# Altium PCB LED.PcbDoc (part 1 of 2)
Units mil, origin at the board's own origin, x right, y up, seen from the top; angles counter-clockwise.
Board outline 7000 x 7000 mil, 2 copper layers (Top Layer, Bottom Layer); 226 components, 111 nets, 676 pads, 222 vias.
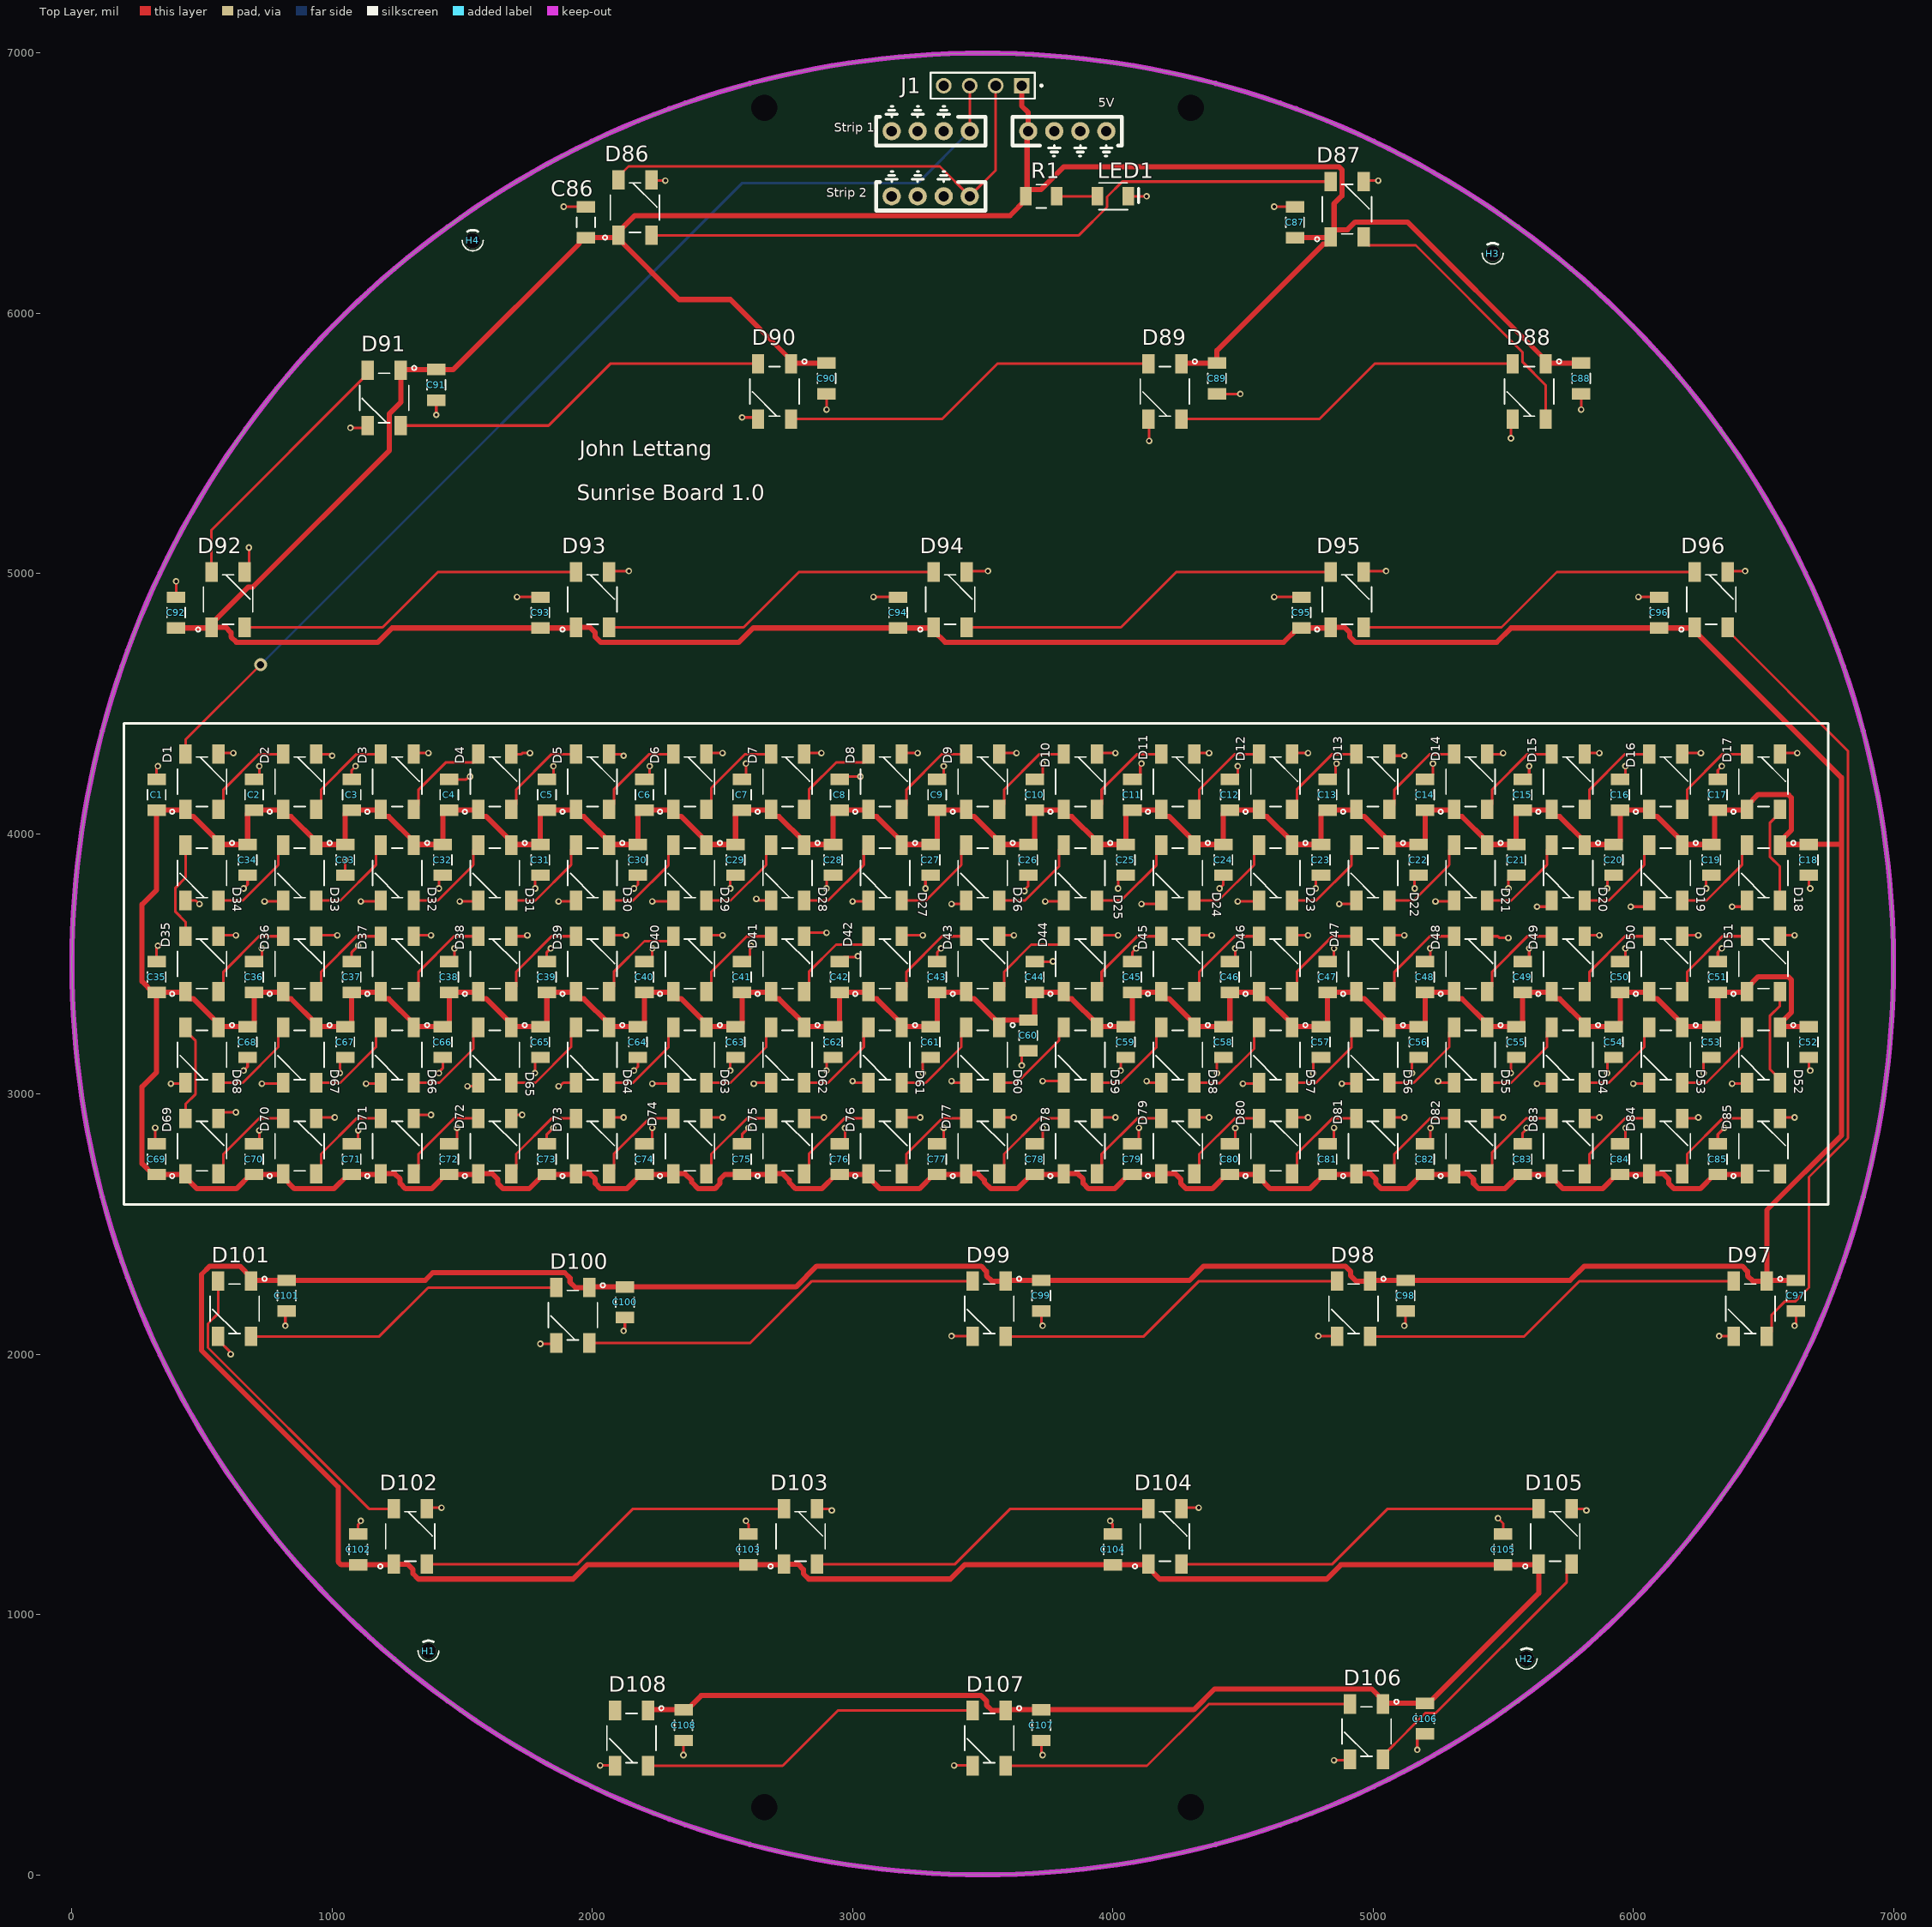
[diagram p0: Top Layer view]
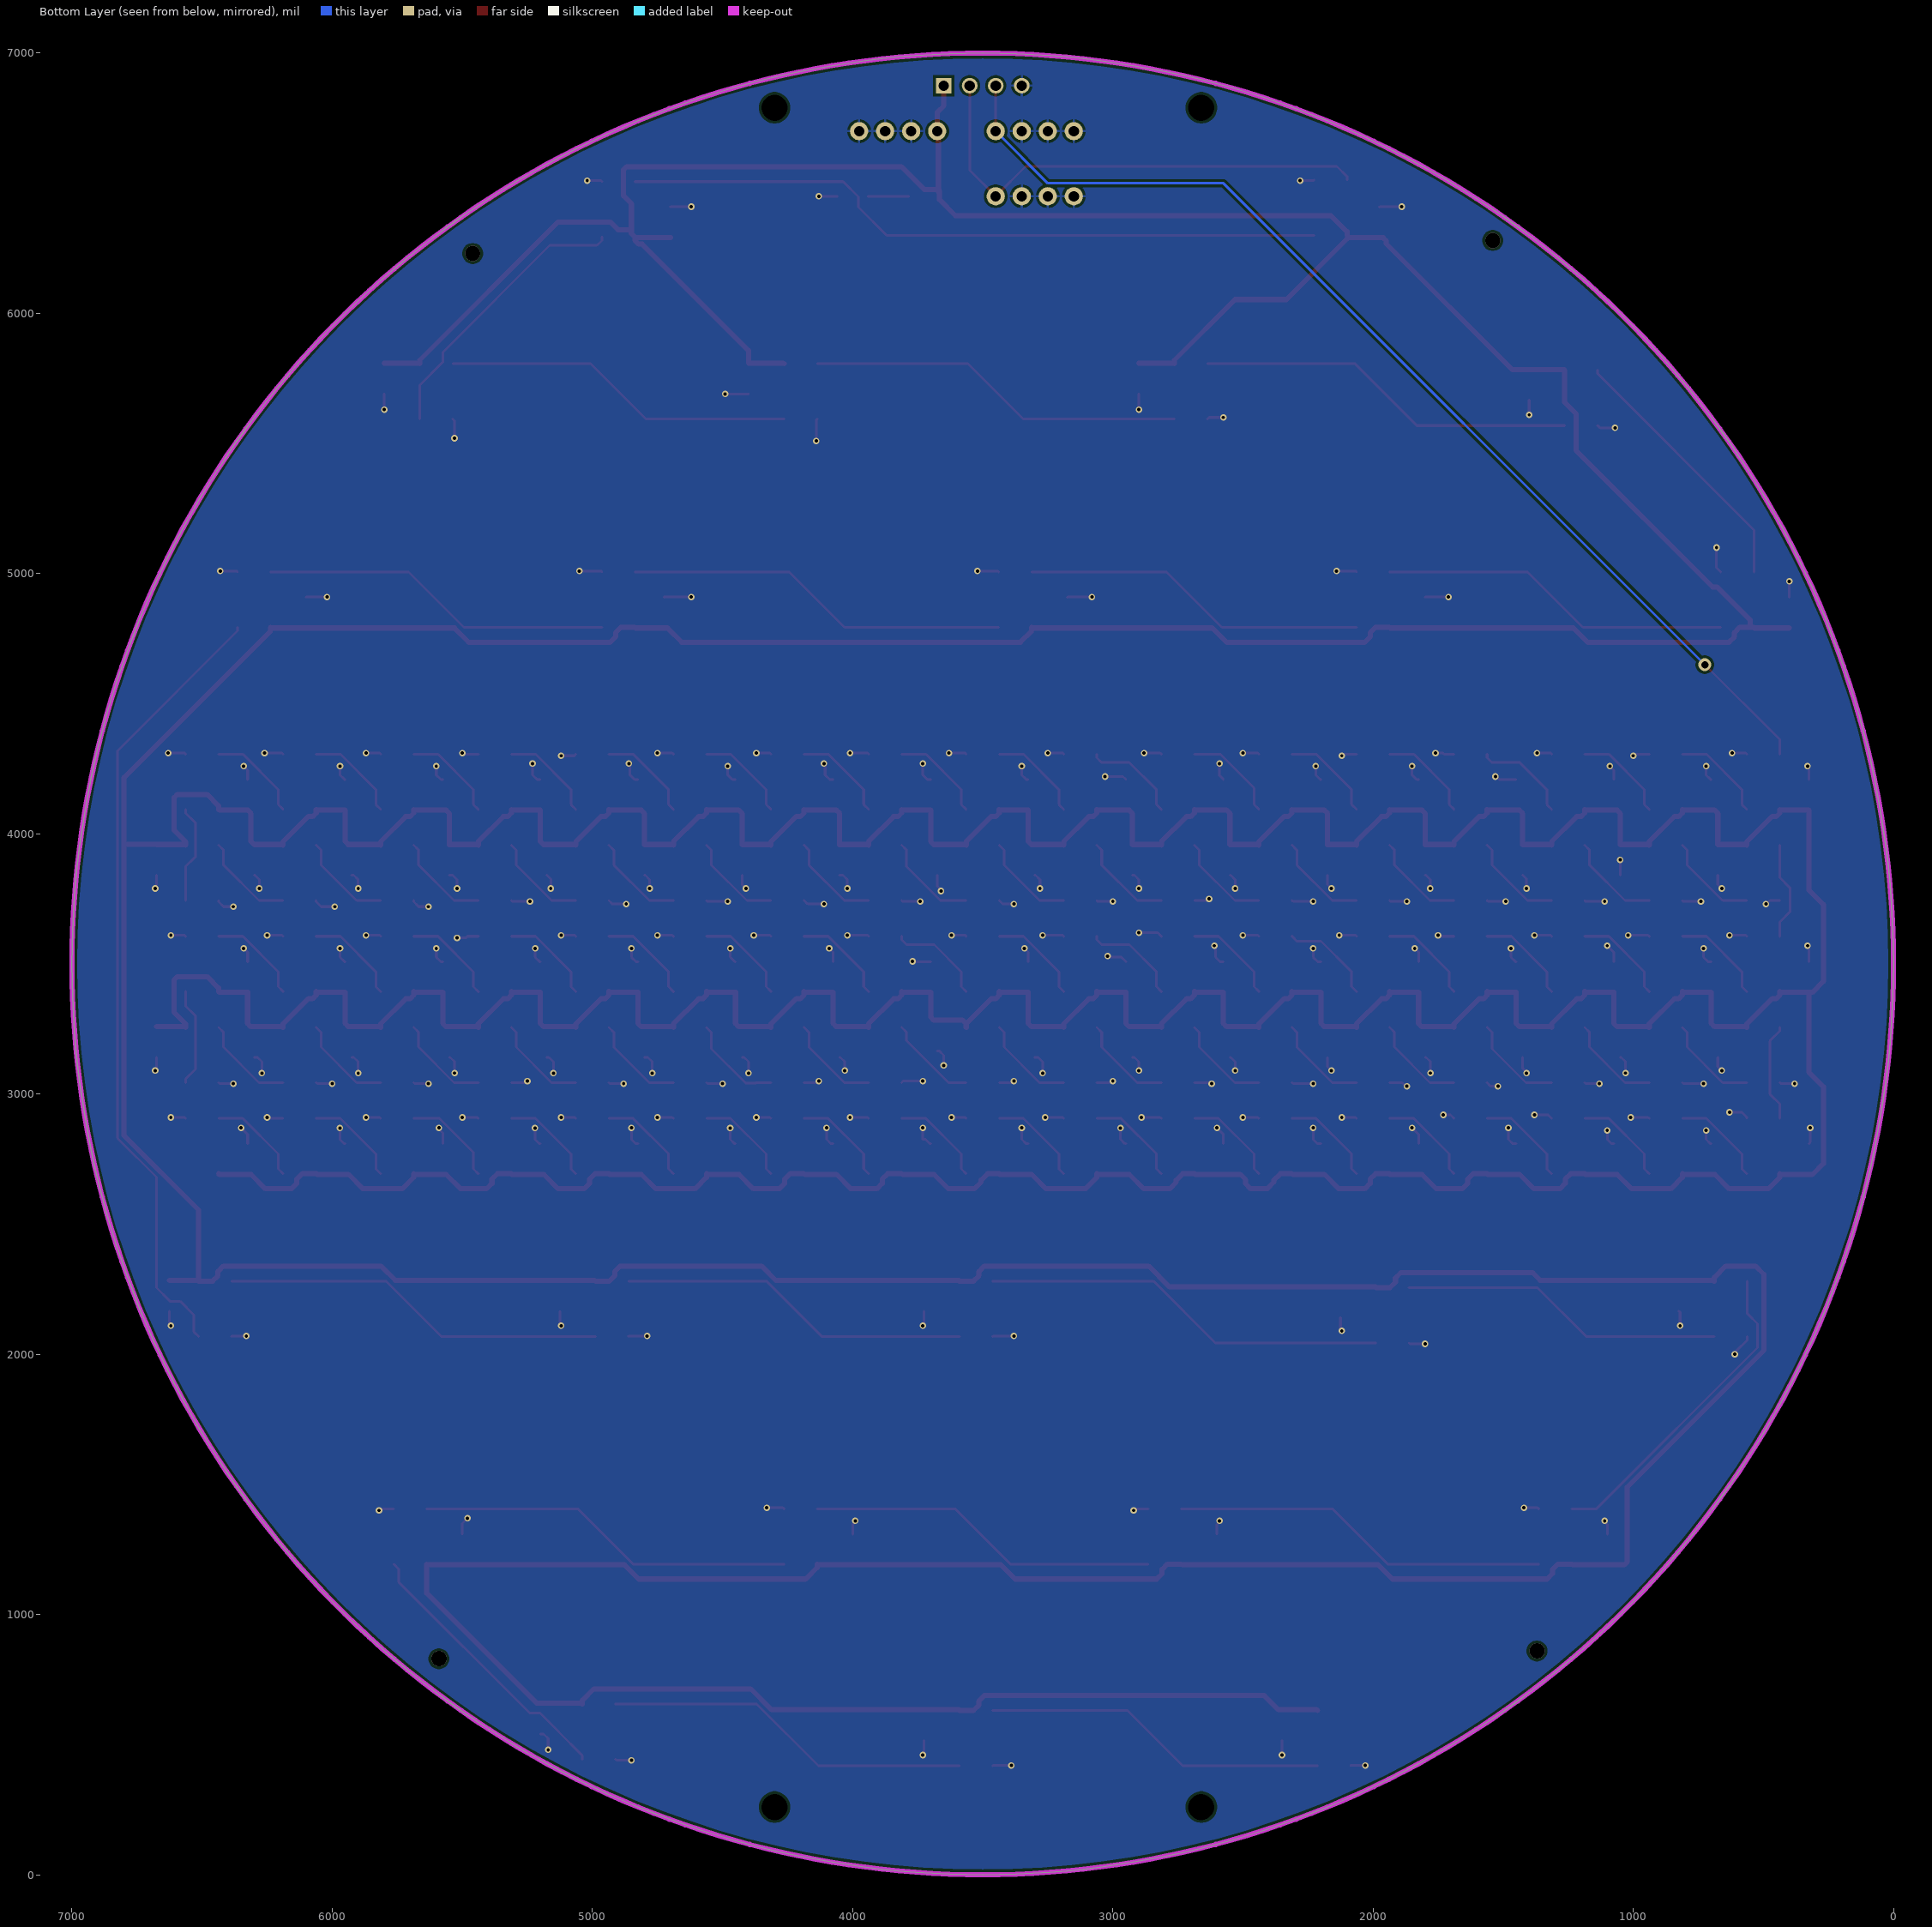
[diagram p1: Bottom Layer view, seen from below]
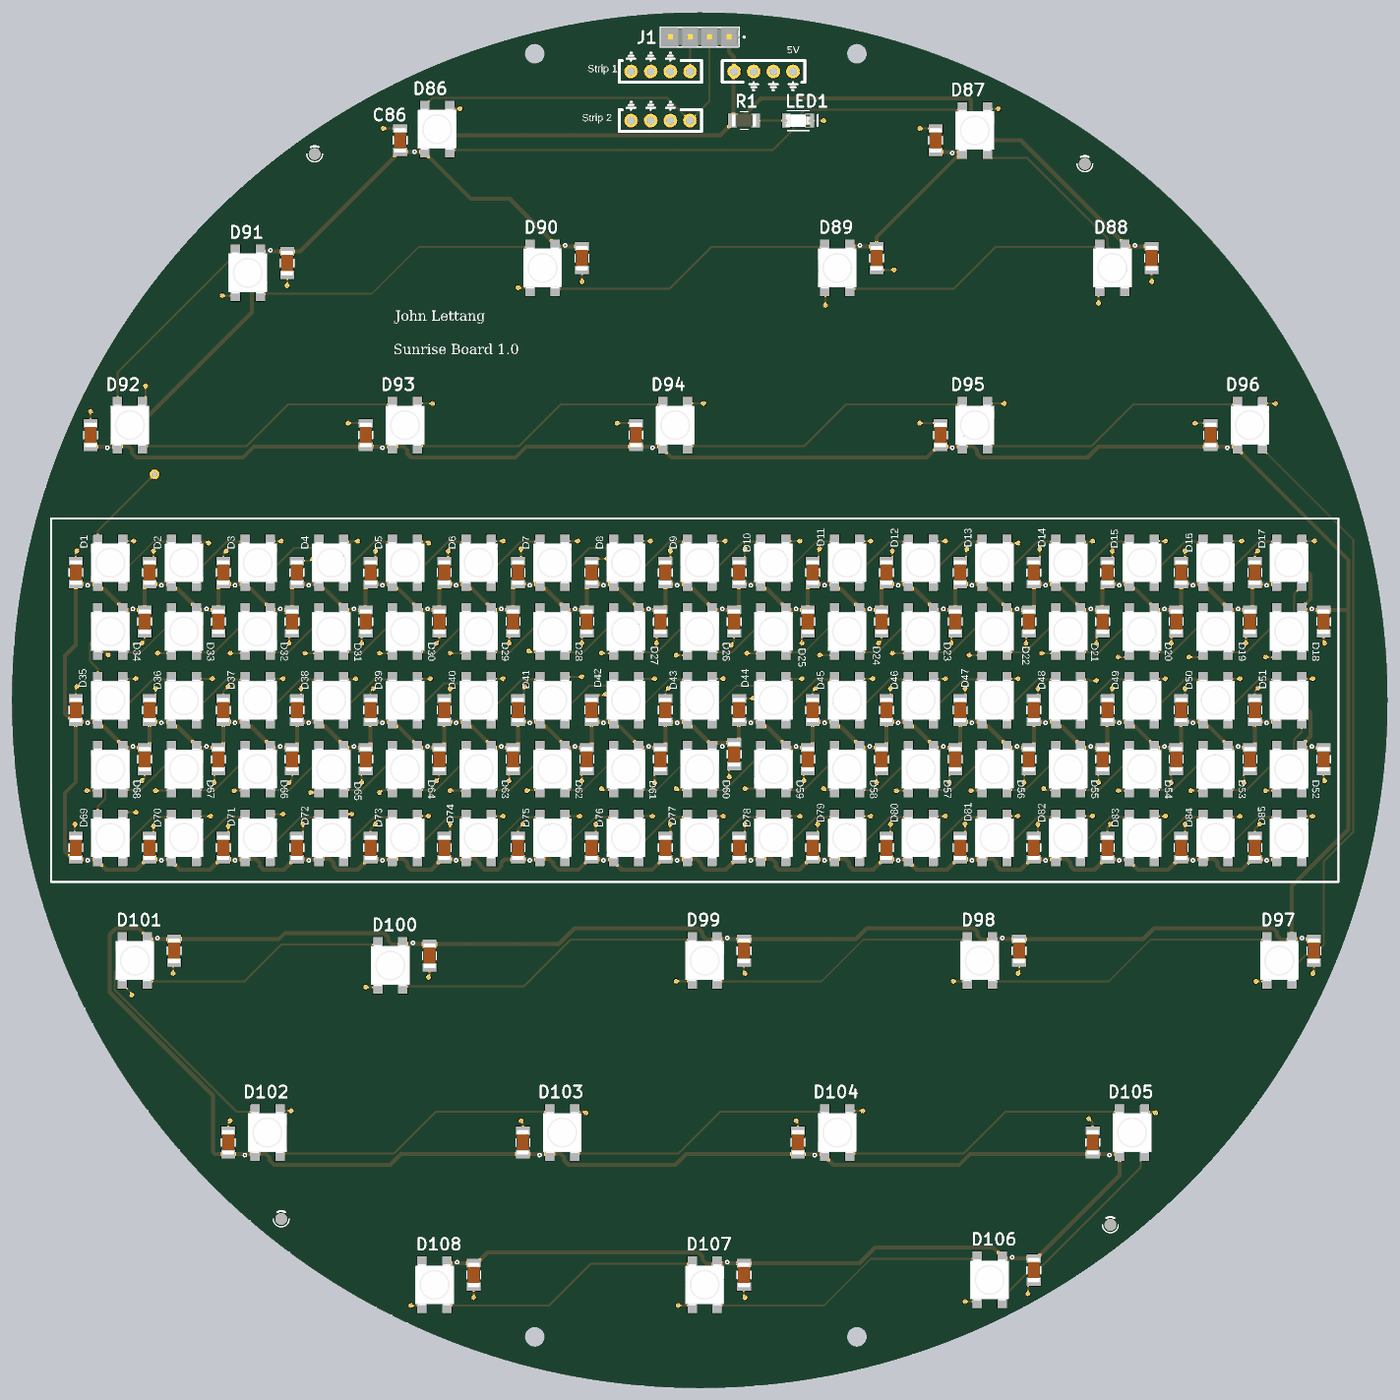
[diagram p3: 3D render of the assembled board from above, using the file's embedded part models]

## Layer stack, top to bottom
Top Solder: solder mask 0.4, Solder Resist, Dk 3.5
Top Layer: signal copper 1.4
Dielectric 1: dielectric 12.6, FR-4, Dk 4.8
Bottom Layer: signal copper 1.4
Bottom Solder: solder mask 0.4, Solder Resist, Dk 3.5

## Board outline
0,3500 ccw(c3500,3500) 3500,0 ccw(c3500,3500) 7000,3500 ccw(c3500,3500) 3500,7000 ccw(c3500,3500)

## Design rules (kind name [scope] priority, off if disabled: settings)
BoardOutlineClearance [All] p1: gap=10 ignorepadtopadclearanceinfootprint=FALSE except(0: Arc-SplitContinuation Track-SplitContinuation SMDPad-SplitContinuation THPad-SplitContinuation Via-SplitContinuation Fill-SplitContinuation Poly-SplitContinuation Region-SplitContinuation Text-SplitContinuation)
Clearance [All] p1: gap=10 ignorepadtopadclearanceinfootprint=FALSE
MinimumSolderMaskSliver [All] p1: minsoldermaskwidth=7.8
PlaneClearance [All] p1: clearance=10
PlaneConnect [All] p1: planeconnectstyle=Direct reliefexpansion=20 reliefentries=4 reliefconductorwidth=10 reliefairgap=10
PolygonConnect [All] p1: thpad.connectstyle=Relief thpad.reliefconductorwidth=10 thpad.reliefentries=4 thpad.polygonreliefangle="90 Angle" thpad.airgapwidth=10 smdpad.connectstyle=Direct smdpad.reliefconductorwidth=10 smdpad.reliefentries=4 smdpad.polygonreliefangle="90 Angle" smdpad.airgapwidth=10 via.connectstyle=Direct via.reliefconductorwidth=10 via.reliefentries=4 via.polygonreliefangle="90 Angle" via.airgapwidth=10
RoutingVias [All] p1: holewidth=13 width=25 viastyle="Through Hole" minholewidth=13 minwidth=25 maxholewidth=60 maxwidth=80
SolderMaskExpansion [All] p1: expansion=4 istentingtop=FALSE
Width "Schematic Width Constraint" [InNet('+5')] p1: maxlimit=20 minlimit=10 preferedwidth=20 minimp=50.000000 maximp=50.000000 favimp=50.000000
Width [All] p2: maxlimit=10 minlimit=10 preferedwidth=10
27 further rules are at their usual default settings.

## Components (designator, comment, footprint, x,y, rotation, side; value= is the part's Value field where it differs from the comment)
5V "10x Probe TP" TP10x_Probe 3825,6700 r0 top (schematic designator TP2)
C1 "22uF" 1206_Passive_Capacitor 325,4150 r270 top
C2 "22uF" 1206_Passive_Capacitor 700,4150 r270 top
C3 "22uF" 1206_Passive_Capacitor 1075,4150 r270 top
C4 "22uF" 1206_Passive_Capacitor 1450,4150 r270 top
C5 "22uF" 1206_Passive_Capacitor 1825,4150 r270 top
C6 "22uF" 1206_Passive_Capacitor 2200,4150 r270 top
C7 "22uF" 1206_Passive_Capacitor 2575,4150 r270 top
C8 "22uF" 1206_Passive_Capacitor 2950,4150 r270 top
C9 "22uF" 1206_Passive_Capacitor 3325,4150 r270 top
C10 "22uF" 1206_Passive_Capacitor 3700,4150 r270 top
C11 "22uF" 1206_Passive_Capacitor 4075,4150 r270 top
C12 "22uF" 1206_Passive_Capacitor 4450,4150 r270 top
C13 "22uF" 1206_Passive_Capacitor 4825,4150 r270 top
C14 "22uF" 1206_Passive_Capacitor 5200,4150 r270 top
C15 "22uF" 1206_Passive_Capacitor 5575,4150 r270 top
C16 "22uF" 1206_Passive_Capacitor 5950,4150 r270 top
C17 "22uF" 1206_Passive_Capacitor 6325,4150 r270 top
C18 "22uF" 1206_Passive_Capacitor 6675,3900 r90 top
C19 "22uF" 1206_Passive_Capacitor 6300,3900 r90 top
C20 "22uF" 1206_Passive_Capacitor 5925,3900 r90 top
C21 "22uF" 1206_Passive_Capacitor 5550,3900 r90 top
C22 "22uF" 1206_Passive_Capacitor 5175,3900 r90 top
C23 "22uF" 1206_Passive_Capacitor 4800,3900 r90 top
C24 "22uF" 1206_Passive_Capacitor 4425,3900 r90 top
C25 "22uF" 1206_Passive_Capacitor 4050,3900 r90 top
C26 "22uF" 1206_Passive_Capacitor 3675,3900 r90 top
C27 "22uF" 1206_Passive_Capacitor 3300,3900 r90 top
C28 "22uF" 1206_Passive_Capacitor 2925,3900 r90 top
C29 "22uF" 1206_Passive_Capacitor 2550,3900 r90 top
C30 "22uF" 1206_Passive_Capacitor 2175,3900 r90 top
C31 "22uF" 1206_Passive_Capacitor 1800,3900 r90 top
C32 "22uF" 1206_Passive_Capacitor 1425,3900 r90 top
C33 "22uF" 1206_Passive_Capacitor 1050,3900 r90 top
C34 "22uF" 1206_Passive_Capacitor 675,3900 r90 top
C35 "22uF" 1206_Passive_Capacitor 325,3450 r270 top
C36 "22uF" 1206_Passive_Capacitor 700,3450 r270 top
C37 "22uF" 1206_Passive_Capacitor 1075,3450 r270 top
C38 "22uF" 1206_Passive_Capacitor 1450,3450 r270 top
C39 "22uF" 1206_Passive_Capacitor 1825,3450 r270 top
C40 "22uF" 1206_Passive_Capacitor 2200,3450 r270 top
C41 "22uF" 1206_Passive_Capacitor 2575,3450 r270 top
C42 "22uF" 1206_Passive_Capacitor 2950,3450 r270 top
C43 "22uF" 1206_Passive_Capacitor 3325,3450 r270 top
C44 "22uF" 1206_Passive_Capacitor 3700,3450 r270 top
C45 "22uF" 1206_Passive_Capacitor 4075,3450 r270 top
C46 "22uF" 1206_Passive_Capacitor 4450,3450 r270 top
C47 "22uF" 1206_Passive_Capacitor 4825,3450 r270 top
C48 "22uF" 1206_Passive_Capacitor 5200,3450 r270 top
C49 "22uF" 1206_Passive_Capacitor 5575,3450 r270 top
C50 "22uF" 1206_Passive_Capacitor 5950,3450 r270 top
C51 "22uF" 1206_Passive_Capacitor 6325,3450 r270 top
C52 "22uF" 1206_Passive_Capacitor 6675,3200 r90 top
C53 "22uF" 1206_Passive_Capacitor 6300,3200 r90 top
C54 "22uF" 1206_Passive_Capacitor 5925,3200 r90 top
C55 "22uF" 1206_Passive_Capacitor 5550,3200 r90 top
C56 "22uF" 1206_Passive_Capacitor 5175,3200 r90 top
C57 "22uF" 1206_Passive_Capacitor 4800,3200 r90 top
C58 "22uF" 1206_Passive_Capacitor 4425,3200 r90 top
C59 "22uF" 1206_Passive_Capacitor 4050,3200 r90 top
C60 "22uF" 1206_Passive_Capacitor 3675,3225 r90 top
C61 "22uF" 1206_Passive_Capacitor 3300,3200 r90 top
C62 "22uF" 1206_Passive_Capacitor 2925,3200 r90 top
C63 "22uF" 1206_Passive_Capacitor 2550,3200 r90 top
C64 "22uF" 1206_Passive_Capacitor 2175,3200 r90 top
C65 "22uF" 1206_Passive_Capacitor 1800,3200 r90 top
C66 "22uF" 1206_Passive_Capacitor 1425,3200 r90 top
C67 "22uF" 1206_Passive_Capacitor 1050,3200 r90 top
C68 "22uF" 1206_Passive_Capacitor 675,3200 r90 top
C69 "22uF" 1206_Passive_Capacitor 325,2750 r270 top
C70 "22uF" 1206_Passive_Capacitor 700,2750 r270 top
C71 "22uF" 1206_Passive_Capacitor 1075,2750 r270 top
C72 "22uF" 1206_Passive_Capacitor 1450,2750 r270 top
C73 "22uF" 1206_Passive_Capacitor 1825,2750 r270 top
C74 "22uF" 1206_Passive_Capacitor 2200,2750 r270 top
C75 "22uF" 1206_Passive_Capacitor 2575,2750 r270 top
C76 "22uF" 1206_Passive_Capacitor 2950,2750 r270 top
C77 "22uF" 1206_Passive_Capacitor 3325,2750 r270 top
C78 "22uF" 1206_Passive_Capacitor 3700,2750 r270 top
C79 "22uF" 1206_Passive_Capacitor 4075,2750 r270 top
C80 "22uF" 1206_Passive_Capacitor 4450,2750 r270 top
C81 "22uF" 1206_Passive_Capacitor 4825,2750 r270 top
C82 "22uF" 1206_Passive_Capacitor 5200,2750 r270 top
C83 "22uF" 1206_Passive_Capacitor 5575,2750 r270 top
C84 "22uF" 1206_Passive_Capacitor 5950,2750 r270 top
C85 "22uF" 1206_Passive_Capacitor 6325,2750 r270 top
C86 "22uF" 1206_Passive_Capacitor 1975,6350 r270 top
C87 "22uF" 1206_Passive_Capacitor 4700,6350 r270 top
C88 "22uF" 1206_Passive_Capacitor 5800,5750 r90 top
C89 "22uF" 1206_Passive_Capacitor 4400,5750 r90 top
C90 "22uF" 1206_Passive_Capacitor 2900,5750 r90 top
C91 "22uF" 1206_Passive_Capacitor 1400,5725 r90 top
C92 "22uF" 1206_Passive_Capacitor 400,4850 r270 top
C93 "22uF" 1206_Passive_Capacitor 1800,4850 r270 top
C94 "22uF" 1206_Passive_Capacitor 3175,4850 r270 top
C95 "22uF" 1206_Passive_Capacitor 4725,4850 r270 top
C96 "22uF" 1206_Passive_Capacitor 6100,4850 r270 top
C97 "22uF" 1206_Passive_Capacitor 6625,2225 r90 top
C98 "22uF" 1206_Passive_Capacitor 5125,2225 r90 top
C99 "22uF" 1206_Passive_Capacitor 3725,2225 r90 top
C100 "22uF" 1206_Passive_Capacitor 2125,2200 r90 top
C101 "22uF" 1206_Passive_Capacitor 825,2225 r90 top
C102 "22uF" 1206_Passive_Capacitor 1100,1250 r270 top
C103 "22uF" 1206_Passive_Capacitor 2600,1250 r270 top
C104 "22uF" 1206_Passive_Capacitor 4000,1250 r270 top
C105 "22uF" 1206_Passive_Capacitor 5500,1250 r270 top
C106 "22uF" 1206_Passive_Capacitor 5200,600 r90 top
C107 "22uF" 1206_Passive_Capacitor 3725,575 r90 top
C108 "22uF" 1206_Passive_Capacitor 2350,575 r90 top
D1 "IN-PI55QATPRPGPBPW" "SERIAL_LED - duplicate" 500,4200 r90 top
D2 "IN-PI55QATPRPGPBPW" "SERIAL_LED - duplicate" 875,4200 r90 top
D3 "IN-PI55QATPRPGPBPW" "SERIAL_LED - duplicate" 1250,4200 r90 top
D4 "IN-PI55QATPRPGPBPW" "SERIAL_LED - duplicate" 1625,4200 r90 top
D5 "IN-PI55QATPRPGPBPW" "SERIAL_LED - duplicate" 2000,4200 r90 top
D6 "IN-PI55QATPRPGPBPW" "SERIAL_LED - duplicate" 2375,4200 r90 top
D7 "IN-PI55QATPRPGPBPW" "SERIAL_LED - duplicate" 2750,4200 r90 top
D8 "IN-PI55QATPRPGPBPW" "SERIAL_LED - duplicate" 3125,4200 r90 top
D9 "IN-PI55QATPRPGPBPW" "SERIAL_LED - duplicate" 3500,4200 r90 top
D10 "IN-PI55QATPRPGPBPW" "SERIAL_LED - duplicate" 3875,4200 r90 top
D11 "IN-PI55QATPRPGPBPW" "SERIAL_LED - duplicate" 4250,4200 r90 top
D12 "IN-PI55QATPRPGPBPW" "SERIAL_LED - duplicate" 4625,4200 r90 top
D13 "IN-PI55QATPRPGPBPW" "SERIAL_LED - duplicate" 5000,4200 r90 top
D14 "IN-PI55QATPRPGPBPW" "SERIAL_LED - duplicate" 5375,4200 r90 top
D15 "IN-PI55QATPRPGPBPW" "SERIAL_LED - duplicate" 5750,4200 r90 top
D16 "IN-PI55QATPRPGPBPW" "SERIAL_LED - duplicate" 6125,4200 r90 top
D17 "IN-PI55QATPRPGPBPW" "SERIAL_LED - duplicate" 6500,4200 r90 top
D18 "IN-PI55QATPRPGPBPW" "SERIAL_LED - duplicate" 6500,3850 r270 top
D19 "IN-PI55QATPRPGPBPW" "SERIAL_LED - duplicate" 6125,3850 r270 top
D20 "IN-PI55QATPRPGPBPW" "SERIAL_LED - duplicate" 5750,3850 r270 top
D21 "IN-PI55QATPRPGPBPW" "SERIAL_LED - duplicate" 5375,3850 r270 top
D22 "IN-PI55QATPRPGPBPW" "SERIAL_LED - duplicate" 5000,3850 r270 top
D23 "IN-PI55QATPRPGPBPW" "SERIAL_LED - duplicate" 4625,3850 r270 top
D24 "IN-PI55QATPRPGPBPW" "SERIAL_LED - duplicate" 4250,3850 r270 top
D25 "IN-PI55QATPRPGPBPW" "SERIAL_LED - duplicate" 3875,3850 r270 top
D26 "IN-PI55QATPRPGPBPW" "SERIAL_LED - duplicate" 3500,3850 r270 top
D27 "IN-PI55QATPRPGPBPW" "SERIAL_LED - duplicate" 3125,3850 r270 top
D28 "IN-PI55QATPRPGPBPW" "SERIAL_LED - duplicate" 2750,3850 r270 top
D29 "IN-PI55QATPRPGPBPW" "SERIAL_LED - duplicate" 2375,3850 r270 top
D30 "IN-PI55QATPRPGPBPW" "SERIAL_LED - duplicate" 2000,3850 r270 top
D31 "IN-PI55QATPRPGPBPW" "SERIAL_LED - duplicate" 1625,3850 r270 top
D32 "IN-PI55QATPRPGPBPW" "SERIAL_LED - duplicate" 1250,3850 r270 top
D33 "IN-PI55QATPRPGPBPW" "SERIAL_LED - duplicate" 875,3850 r270 top
D34 "IN-PI55QATPRPGPBPW" "SERIAL_LED - duplicate" 500,3850 r270 top
D35 "IN-PI55QATPRPGPBPW" "SERIAL_LED - duplicate" 500,3500 r90 top
D36 "IN-PI55QATPRPGPBPW" "SERIAL_LED - duplicate" 875,3500 r90 top
D37 "IN-PI55QATPRPGPBPW" "SERIAL_LED - duplicate" 1250,3500 r90 top
D38 "IN-PI55QATPRPGPBPW" "SERIAL_LED - duplicate" 1625,3500 r90 top
D39 "IN-PI55QATPRPGPBPW" "SERIAL_LED - duplicate" 2000,3500 r90 top
D40 "IN-PI55QATPRPGPBPW" "SERIAL_LED - duplicate" 2375,3500 r90 top
D41 "IN-PI55QATPRPGPBPW" "SERIAL_LED - duplicate" 2750,3500 r90 top
D42 "IN-PI55QATPRPGPBPW" "SERIAL_LED - duplicate" 3125,3500 r90 top
D43 "IN-PI55QATPRPGPBPW" "SERIAL_LED - duplicate" 3500,3500 r90 top
D44 "IN-PI55QATPRPGPBPW" "SERIAL_LED - duplicate" 3875,3500 r90 top
D45 "IN-PI55QATPRPGPBPW" "SERIAL_LED - duplicate" 4250,3500 r90 top
D46 "IN-PI55QATPRPGPBPW" "SERIAL_LED - duplicate" 4625,3500 r90 top
D47 "IN-PI55QATPRPGPBPW" "SERIAL_LED - duplicate" 5000,3500 r90 top
D48 "IN-PI55QATPRPGPBPW" "SERIAL_LED - duplicate" 5375,3500 r90 top
D49 "IN-PI55QATPRPGPBPW" "SERIAL_LED - duplicate" 5750,3500 r90 top
D50 "IN-PI55QATPRPGPBPW" "SERIAL_LED - duplicate" 6125,3500 r90 top
D51 "IN-PI55QATPRPGPBPW" "SERIAL_LED - duplicate" 6500,3500 r90 top
D52 "IN-PI55QATPRPGPBPW" "SERIAL_LED - duplicate" 6500,3150 r270 top
D53 "IN-PI55QATPRPGPBPW" "SERIAL_LED - duplicate" 6125,3150 r270 top
D54 "IN-PI55QATPRPGPBPW" "SERIAL_LED - duplicate" 5750,3150 r270 top
D55 "IN-PI55QATPRPGPBPW" "SERIAL_LED - duplicate" 5375,3150 r270 top
D56 "IN-PI55QATPRPGPBPW" "SERIAL_LED - duplicate" 5000,3150 r270 top
D57 "IN-PI55QATPRPGPBPW" "SERIAL_LED - duplicate" 4625,3150 r270 top
D58 "IN-PI55QATPRPGPBPW" "SERIAL_LED - duplicate" 4250,3150 r270 top
D59 "IN-PI55QATPRPGPBPW" "SERIAL_LED - duplicate" 3875,3150 r270 top
D60 "IN-PI55QATPRPGPBPW" "SERIAL_LED - duplicate" 3500,3150 r270 top
D61 "IN-PI55QATPRPGPBPW" "SERIAL_LED - duplicate" 3125,3150 r270 top
D62 "IN-PI55QATPRPGPBPW" "SERIAL_LED - duplicate" 2750,3150 r270 top
D63 "IN-PI55QATPRPGPBPW" "SERIAL_LED - duplicate" 2375,3150 r270 top
D64 "IN-PI55QATPRPGPBPW" "SERIAL_LED - duplicate" 2000,3150 r270 top
D65 "IN-PI55QATPRPGPBPW" "SERIAL_LED - duplicate" 1625,3150 r270 top
D66 "IN-PI55QATPRPGPBPW" "SERIAL_LED - duplicate" 1250,3150 r270 top
D67 "IN-PI55QATPRPGPBPW" "SERIAL_LED - duplicate" 875,3150 r270 top
D68 "IN-PI55QATPRPGPBPW" "SERIAL_LED - duplicate" 500,3150 r270 top
D69 "IN-PI55QATPRPGPBPW" "SERIAL_LED - duplicate" 500,2800 r90 top
D70 "IN-PI55QATPRPGPBPW" "SERIAL_LED - duplicate" 875,2800 r90 top
D71 "IN-PI55QATPRPGPBPW" "SERIAL_LED - duplicate" 1250,2800 r90 top
D72 "IN-PI55QATPRPGPBPW" "SERIAL_LED - duplicate" 1625,2800 r90 top
D73 "IN-PI55QATPRPGPBPW" "SERIAL_LED - duplicate" 2000,2800 r90 top
D74 "IN-PI55QATPRPGPBPW" "SERIAL_LED - duplicate" 2375,2800 r90 top
D75 "IN-PI55QATPRPGPBPW" "SERIAL_LED - duplicate" 2750,2800 r90 top
D76 "IN-PI55QATPRPGPBPW" "SERIAL_LED - duplicate" 3125,2800 r90 top
D77 "IN-PI55QATPRPGPBPW" "SERIAL_LED - duplicate" 3500,2800 r90 top
D78 "IN-PI55QATPRPGPBPW" "SERIAL_LED - duplicate" 3875,2800 r90 top
D79 "IN-PI55QATPRPGPBPW" "SERIAL_LED - duplicate" 4250,2800 r90 top
D80 "IN-PI55QATPRPGPBPW" "SERIAL_LED - duplicate" 4625,2800 r90 top
D81 "IN-PI55QATPRPGPBPW" "SERIAL_LED - duplicate" 5000,2800 r90 top
D82 "IN-PI55QATPRPGPBPW" "SERIAL_LED - duplicate" 5375,2800 r90 top
D83 "IN-PI55QATPRPGPBPW" "SERIAL_LED - duplicate" 5750,2800 r90 top
D84 "IN-PI55QATPRPGPBPW" "SERIAL_LED - duplicate" 6125,2800 r90 top
D85 "IN-PI55QATPRPGPBPW" "SERIAL_LED - duplicate" 6500,2800 r90 top
D86 "IN-PI55QATPRPGPBPW" "SERIAL_LED - duplicate" 2163.5,6406.3 r90 top
D87 "IN-PI55QATPRPGPBPW" "SERIAL_LED - duplicate" 4900,6400 r90 top
D88 "IN-PI55QATPRPGPBPW" "SERIAL_LED - duplicate" 5600,5700 r270 top
D89 "IN-PI55QATPRPGPBPW" "SERIAL_LED - duplicate" 4200,5700 r270 top
D90 "IN-PI55QATPRPGPBPW" "SERIAL_LED - duplicate" 2700,5700 r270 top
D91 "IN-PI55QATPRPGPBPW" "SERIAL_LED - duplicate" 1200,5675 r270 top
D92 "IN-PI55QATPRPGPBPW" "SERIAL_LED - duplicate" 600,4900 r90 top
D93 "IN-PI55QATPRPGPBPW" "SERIAL_LED - duplicate" 2000,4900 r90 top
D94 "IN-PI55QATPRPGPBPW" "SERIAL_LED - duplicate" 3375,4900 r90 top
D95 "IN-PI55QATPRPGPBPW" "SERIAL_LED - duplicate" 4900,4900 r90 top
D96 "IN-PI55QATPRPGPBPW" "SERIAL_LED - duplicate" 6300,4900 r90 top
D97 "IN-PI55QATPRPGPBPW" "SERIAL_LED - duplicate" 6450,2175 r270 top
D98 "IN-PI55QATPRPGPBPW" "SERIAL_LED - duplicate" 4925,2175 r270 top
D99 "IN-PI55QATPRPGPBPW" "SERIAL_LED - duplicate" 3525,2175 r270 top
D100 "IN-PI55QATPRPGPBPW" "SERIAL_LED - duplicate" 1925,2150 r270 top
D101 "IN-PI55QATPRPGPBPW" "SERIAL_LED - duplicate" 625,2175 r270 top
D102 "IN-PI55QATPRPGPBPW" "SERIAL_LED - duplicate" 1300,1300 r90 top
D103 "IN-PI55QATPRPGPBPW" "SERIAL_LED - duplicate" 2800,1300 r90 top
D104 "IN-PI55QATPRPGPBPW" "SERIAL_LED - duplicate" 4200,1300 r90 top
D105 "IN-PI55QATPRPGPBPW" "SERIAL_LED - duplicate" 5700,1300 r90 top
D106 "IN-PI55QATPRPGPBPW" "SERIAL_LED - duplicate" 4975,550 r270 top
D107 "IN-PI55QATPRPGPBPW" "SERIAL_LED - duplicate" 3525,525 r270 top
D108 "IN-PI55QATPRPGPBPW" "SERIAL_LED - duplicate" 2150,525 r270 top
H1 "Stencil Hole" AlignmentHole_1.5mm 1370,860 r0 top
H2 "Stencil Hole" AlignmentHole_1.5mm 5590,830 r0 top
H3 "Stencil Hole" AlignmentHole_1.5mm 5460,6230 r0 top
H4 "Stencil Hole" AlignmentHole_1.5mm 1540,6280 r0 top
J1 "TSW-104-14-S-S" JM-4_TSW-104-14-S-S 3650,6875 r180 top
LED1 "Red" LED_1206 4000,6450 r0 top
R1 "1k" 1206_Passive_Resitor 3725,6450 r180 top value="1K Ohm"
"Strip 1" "10x Probe TP" TP10x_Probe 3300,6700 r180 top (schematic designator TP1)
"Strip 2" "10x Probe TP" TP10x_Probe 3300,6450 r180 top (schematic designator TP3)

## Footprints (in the part's own frame and the unit in brackets; to place one, negate y for a bottom-side part, rotate by r counter-clockwise, add the part's x,y. Pads: shape width x height; smd on the part's side, far side on the other; paste and mask are expansions set on the pad)
1206_Passive_Capacitor [mil]
  rect 44x71 smd: 1(-59,0) 2(59,0)
  silkscreen extent -19,-35 19,35, body extent -63,-31 63,32, height 50
1206_Passive_Resitor [mil]
  rect 44x71 smd: 1(-59,0) 2(59,0)
  silkscreen extent -19,-45 19,45, body extent -61,-31 61,31, height 26
AlignmentHole_1.5mm [mm]
  round 1.55 on Top Paste paste+0 mask+0: 1(0,0)
  silkscreen extent -1.02,-1.01 1.02,1.01
JM-4_TSW-104-14-S-S [mil]
  rect 60x60 / inner round 60 / far side rect 60x60 hole 40.16: 01(0,0)
  round 60 hole 40.16: 02(100,0) 03(200,0) 04(300,0)
  silkscreen extent -80,-50 350,50, body extent -55,-50 350,50, height 420
LED_1206 [mil]
  rect 44x71 smd: 1(-59,0) 2(59,0)
  silkscreen extent -54,-51 99,51, body extent -63,-31 63,31, height 28
"SERIAL_LED - duplicate" [mil] "Footprint for serial LED"
  rect 74.8x47.5 smd: 1(-106.3,63.5) 2(-106.3,-63.5) 3(106.3,-63.5) 4(106.3,63.5)
  silkscreen extent -124,-94 95,124, body extent -106,-98 106,98, height 63
TP10x_Probe [mil] "Small Probs footprint"
  round 70 hole 40: 1(-150,0) 2(-50,0) 2(50,0) 2(150,0)
  silkscreen extent -210,-95 210,55

## Part data
5V "Strip 1" "Strip 2": library part TP_10x_Probe, "Test Point 300 mil centers"
C1 C2 C3 C4 C5 C6 C7 C8 C9 C10 C11 C12 C13 C14 C15 C16 C17 C18 C19 C20 C21 C22 C23 C24 C25 C26 C27 C28 C29 C30 C31 C32 C33 C34 C35 C36 C37 C38 C39 C40 C41 C42 C43 C44 C45 C46 C47 C48 C49 C50 C51 C52 C53 C54 C55 C56 C57 C58 C59 C60 C61 C62 C63 C64 C65 C66 C67 C68 C69 C70 C71 C72 C73 C74 C75 C76 C77 C78 C79 C80 C81 C82 C83 C84 C85 C86 C87 C88 C89 C90 C91 C92 C93 C94 C95 C96 C97 C98 C99 C100 C101 C102 C103 C104 C105 C106 C107 C108: library part C_22uF_1206, "22uF ±10% 25V X5R 1206 Multilayer Ceramic Capacitors MLCC - SMD/SMT RoHS", LCSC Part#=C12891, MFR Part #=CL31A226KAHNNNE, Datasheet=https://datasheet.lcsc.com/lcsc/1811031514_Samsung-Electro-Mechanics-CL31A226KAHNNNE_C12891.pdf, Type=basic
D1 D2 D3 D4 D5 D6 D7 D8 D9 D10 D11 D12 D13 D14 D15 D16 D17 D18 D19 D20 D21 D22 D23 D24 D25 D26 D27 D28 D29 D30 D31 D32 D33 D34 D35 D36 D37 D38 D39 D40 D41 D42 D43 D44 D45 D46 D47 D48 D49 D50 D51 D52 D53 D54 D55 D56 D57 D58 D59 D60 D61 D62 D63 D64 D65 D66 D67 D68 D69 D70 D71 D72 D73 D74 D75 D76 D77 D78 D79 D80 D81 D82 D83 D84 D85 D86 D87 D88 D89 D90 D91 D92 D93 D94 D95 D96 D97 D98 D99 D100 D101 D102 D103 D104 D105 D106 D107 D108: library part LED_Smart, "LIGHT EMITTING DIODES (LED) RGB 620~630NM RED, 520~530NM GREEN, 465~475NM BLUE 600MCD@16MARED,1200MCD@16MAGREEN,300MCD@16MABLUE TOP VIEW SMD-4 ROHS", LCSC Part#=C2843785, Manufacturer=XINGLIGHT, MFR Part #=XL-5050RGBC-WS2812B, Datasheet=https://datasheet.lcsc.com/lcsc/2301111130_XINGLIGHT-XL-5050RGBC-WS2812B_C2843785.pdf
H1 H2 H3 H4: library part H_StencilAllignment_1.5mm, "Stencil Allignment hole for use with 1.5mm pin"
J1: library part JM_4_PIN_MALE, "Square Pins 2.5mm 6mm -40℃~+105℃ 1 4 3mm 2.54mm Black 1x4P Straight,P=2.54mm  Pin Headers ROHS", LCSC Part#=C2691448, MFR Part #=PZ254V-11-04P, MP=TSW-104-14-S-S
LED1: library part LED_RED_1206, "Red 621~631nm 1206 Light Emitting Diodes (LED) RoHS", LCSC Part#=C93133, MFR Part #=15-21/R6C-FQ1R1B/2T, Datasheet=https://datasheet.lcsc.com/szlcsc/1811151241_Everlight-Elec-15-21-R6C-FQ1R1B-2T_C93133.pdf, Type=Extended
R1: library part R_1K_1206, "CHIP RESISTOR - SURFACE MOUNT 1KOHMS ±1% 1/4W 1206 ROHS", LCSC Part#=C4410, MFR Part #=RNCP1206FTD1K00CT, Digikey Link=https://www.digikey.com/product-detail/en/RNCP1206FTD1K00/RNCP1206FTD1K00CT-ND/2240675/?itemSeq=304982373, Type=Basic

## Free pads (board coordinates)
  round 60 hole 100 unplated: 3(2660,260) 3(2660,6790) 3(4300,260) 3(4300,6790)

## Via types
v1: diameter 25, hole 13, Top Layer to Bottom Layer, 217 vias
v2: diameter 59.06, hole 59.06, Top Layer to Bottom Layer, 4 vias
v3: diameter 50, hole 28, Top Layer to Bottom Layer, 1 vias

## Nets (pads, with @x,y where several pads share a name; then routed paths per layer and width w, separated by ;. In a path a pad name is that pad's centre, name@x,y a point inside that pad or via, vN(x,y) a via of type N, cw(c..) or ccw(c..) an arc to the next point about the centre after c; other vN are vias at no path point)
+5: 5V.1 C1.2 C2.2 C3.2 C4.2 C5.2 C6.2 C7.2 C8.2 C9.2 C10.2 C11.2 C12.2 C13.2 C14.2 C15.2 C16.2 C17.2 C18.2 C19.2 C20.2 C21.2 C22.2 C23.2 C24.2 C25.2 C26.2 C27.2 C28.2 C29.2 C30.2 C31.2 C32.2 C33.2 C34.2 C35.2 C36.2 C37.2 C38.2 C39.2 C40.2 C41.2 C42.2 C43.2 C44.2 C45.2 C46.2 C47.2 C48.2 C49.2 C50.2 C51.2 C52.2 C53.2 C54.2 C55.2 C56.2 C57.2 C58.2 C59.2 C60.2 C61.2 C62.2 C63.2 C64.2 C65.2 C66.2 C67.2 C68.2 C69.2 C70.2 C71.2 C72.2 C73.2 C74.2 C75.2 C76.2 C77.2 C78.2 C79.2 C80.2 C81.2 C82.2 C83.2 C84.2 C85.2 C86.2 C87.2 C88.2 C89.2 C90.2 C91.2 C92.2 C93.2 C94.2 C95.2 C96.2 C97.2 C98.2 C99.2 C100.2 C101.2 C102.2 C103.2 C104.2 C105.2 C106.2 C107.2 C108.2 D1.1 D2.1 D3.1 D4.1 D5.1 D6.1 D7.1 D8.1 D9.1 D10.1 D11.1 D12.1 D13.1 D14.1 D15.1 D16.1 D17.1 D18.1 D19.1 D20.1 D21.1 D22.1 D23.1 D24.1 D25.1 D26.1 D27.1 D28.1 D29.1 D30.1 D31.1 D32.1 D33.1 D34.1 D35.1 D36.1 D37.1 D38.1 D39.1 D40.1 D41.1 D42.1 D43.1 D44.1 D45.1 D46.1 D47.1 D48.1 D49.1 D50.1 D51.1 D52.1 D53.1 D54.1 D55.1 D56.1 D57.1 D58.1 D59.1 D60.1 D61.1 D62.1 D63.1 D64.1 D65.1 D66.1 D67.1 D68.1 D69.1 D70.1 D71.1 D72.1 D73.1 D74.1 D75.1 D76.1 D77.1 D78.1 D79.1 D80.1 D81.1 D82.1 D83.1 D84.1 D85.1 D86.1 D87.1 D88.1 D89.1 D90.1 D91.1 D92.1 D93.1 D94.1 D95.1 D96.1 D97.1 D98.1 D99.1 D100.1 D101.1 D102.1 D103.1 D104.1 D105.1 D106.1 D107.1 D108.1 J1.01 R1.2 | length 62677.4
  Top Layer w20: C92.2@400,4791 533.8,4791 D92.1@536.5,4793.7 D92.1@550,4793.7 ; D86.1@2100,6286.35 2333.2,6053.15 2530.3,6053.15 2763.5,5819.95 D90.1@2763.5,5806.3 2766.2,5809 C90.2@2900,5809 ; D108.1@2213.5,631.3 2216.2,634 2363.5,634 2418.2,688.7 3493.53,688.7 3514.14,668.09 3514.14,651.91 3534.75,631.3 D107.1@3588.5,631.3 3591.2,634 4311.14,634 4390.85,713.7 4994.75,713.7 5038.5,669.95 D106.1@5038.5,656.3 5041.2,659 5213.5,659 5636.5,1082 D105.1@5636.5,1193.7 5633.8,1191 4876.36,1191 4821.65,1136.3 4180.25,1136.3 4136.5,1180.05 D104.1@4136.5,1193.7 4133.8,1191 3430.33,1191 3375.63,1136.3 2831.47,1136.3 2810.86,1156.91 2810.86,1173.09 2790.25,1193.7 D103.1@2736.5,1193.7 2733.8,1191 1980.33,1191 1925.63,1136.3 1331.47,1136.3 1310.86,1156.91 1310.86,1173.09 1290.25,1193.7 D102.1@1236.5,1193.7 1233.8,1191 1034.5,1191 1022.78,1202.72 1022.78,1489.7 497.75,2014.73 497.75,2306.99 529.47,2338.7 644.75,2338.7 688.5,2294.95 D101.1@688.5,2281.3 691.2,2284 1357.17,2284 1386.87,2313.7 1893.53,2313.7 1914.14,2293.09 1914.14,2276.91 1934.75,2256.3 D100.1@1988.5,2256.3 1991.2,2259 2782.17,2259 2861.87,2338.7 3493.53,2338.7 3514.14,2318.09 3514.14,2301.91 3534.75,2281.3 D99.1@3588.5,2281.3 3591.2,2284 4294.67,2284 4349.37,2338.7 4893.53,2338.7 4914.14,2318.09 4914.14,2301.91 4934.75,2281.3 D98.1@4988.5,2281.3 4991.2,2284 5757.17,2284 5811.87,2338.7 6418.53,2338.7 6439.14,2318.09 6439.14,2301.91 6459.75,2281.3 D97.1@6513.5,2281.3 ; D9.1@3433.8,4091 C9.2@3325,4091 3325,3971 3313,3959 3191.2,3959 D27.1@3188.5,3956.3 3188.5,3969.95 3092.15,4066.3 3075.25,4066.3 3061.5,4080.05 D8.1@3061.5,4093.7 3058.8,4091 2937,4091 2925,4079 C28.2@2925,3959 2816.2,3959 D28.1@2813.5,3956.3 2813.5,3969.95 2717.15,4066.3 2700.25,4066.3 2686.5,4080.05 D7.1@2686.5,4093.7 2683.8,4091 2562,4091 2550,4079 C29.2@2550,3959 2441.2,3959 D29.1@2438.5,3956.3 2438.5,3969.95 2342.15,4066.3 2325.25,4066.3 2311.5,4080.05 D6.1@2311.5,4093.7 2308.8,4091 2187,4091 2175,4079 C30.2@2175,3959 2066.2,3959 D30.1@2063.5,3956.3 2063.5,3969.95 1967.15,4066.3 1950.25,4066.3 1936.5,4080.05 D5.1@1936.5,4093.7 1933.8,4091 1812,4091 1800,4079 C31.2@1800,3959 1691.2,3959 D31.1@1688.5,3956.3 1688.5,3969.95 1592.15,4066.3 1575.25,4066.3 1561.5,4080.05 D4.1@1561.5,4093.7 1558.8,4091 1437,4091 1425,4079 C32.2@1425,3959 1316.2,3959 D32.1@1313.5,3956.3 1313.5,3969.95 1217.15,4066.3 1200.25,4066.3 1186.5,4080.05 D3.1@1186.5,4093.7 1183.8,4091 1062,4091 1050,4079 C33.2@1050,3959 941.2,3959 D33.1@938.5,3956.3 938.5,3969.95 842.15,4066.3 825.25,4066.3 811.5,4080.05 D2.1@811.5,4093.7 808.8,4091 687,4091 675,4079 C34.2@675,3959 566.2,3959 D34.1@563.5,3956.3 563.5,3969.95 467.15,4066.3 450.25,4066.3 436.5,4080.05 D1.1@436.5,4093.7 433.8,4091 C1.2@325,4091 325,3783.75 269.5,3728.25 269.5,3433 311.5,3391 C35.2@325,3391 ; D9.1@3436.5,4093.7 3436.5,4080.05 3450.25,4066.3 3467.15,4066.3 3563.5,3969.95 D26.1@3563.5,3956.3 3566.2,3959 3688,3959 3700,3971 C10.2@3700,4091 3808.8,4091 D10.1@3811.5,4093.7 3811.5,4080.05 3825.25,4066.3 3842.15,4066.3 3938.5,3969.95 D25.1@3938.5,3956.3 3941.2,3959 C25.2@4050,3959 4050,4079 4062,4091 4183.8,4091 D11.1@4186.5,4093.7 4186.5,4080.05 4200.25,4066.3 4217.15,4066.3 4313.5,3969.95 D24.1@4313.5,3956.3 4316.2,3959 C24.2@4425,3959 4425,4079 4437,4091 4558.8,4091 D12.1@4561.5,4093.7 4561.5,4080.05 4575.25,4066.3 4592.15,4066.3 4688.5,3969.95 D23.1@4688.5,3956.3 4691.2,3959 C23.2@4800,3959 4800,4079 4812,4091 4933.8,4091 D13.1@4936.5,4093.7 4936.5,4080.05 4950.25,4066.3 4967.15,4066.3 5063.5,3969.95 D22.1@5063.5,3956.3 5066.2,3959 5188,3959 5200,3971 C14.2@5200,4091 5308.8,4091 D14.1@5311.5,4093.7 5311.5,4080.05 5325.25,4066.3 5342.15,4066.3 5438.5,3969.95 D21.1@5438.5,3956.3 5441.2,3959 C21.2@5550,3959 5550,4079 5562,4091 5683.8,4091 D15.1@5686.5,4093.7 5686.5,4080.05 5700.25,4066.3 5717.15,4066.3 5813.5,3969.95 D20.1@5813.5,3956.3 5816.2,3959 5938,3959 5950,3971 C16.2@5950,4091 6058.8,4091 D16.1@6061.5,4093.7 6061.5,4080.05 6075.25,4066.3 6092.15,4066.3 6188.5,3969.95 D19.1@6188.5,3956.3 6191.2,3959 C19.2@6300,3959 6312,3971 6312,4079 C17.2@6324,4091 ; D60.1@3563.5,3256.3 D60.1@3563.5,3269.95 ; J1.01@3650,6875 3650,6796.76 3675,6771.76 5V.1@3675,6700 3670.5,6695.5 3670.5,6475.5 3666,6471 3666,6436.5 3605.45,6375.95 2162.3,6375.95 2100,6313.65 D86.1@2100,6300 2091,6291 1961.5,6291 1949.5,6279 1949.5,6268 1465.5,5784 1266.2,5784 D91.1@1263.5,5781.3 1263.5,5658.14 1219.75,5614.39 1219.75,5473.11 695.53,4948.9 678.05,4948.9 550.25,4821.1 550.25,4793.95 D92.1@550,4793.7 ; R1.2@3670.5,6468 3678,6475.5 3723.72,6475.5 3811.92,6563.7 4868.53,6563.7 4880.25,6551.99 4880.25,6451.54 4850.25,6421.54 D87.1@4850.25,6321.1 ; D89.1@4263.5,5806.3 4266.2,5809 C89.2@4400,5809 4400,5857.2 4809.1,6266.3 4822.75,6266.3 4836.5,6280.05 D87.1@4836.5,6293.7 ; C87.2@4700,6291 4833.8,6291 D87.1@4836.5,6293.7 ; C88.2@5800,5809 5666.2,5809 D88.1@5663.5,5806.3 5663.5,5819.95 5132.35,6351.1 4931.47,6351.1 4901.47,6321.1 D87.1@4850.25,6321.1 ; C17.2@6325,4091 6433.8,4091 D17.1@6436.5,4093.7 6436.5,4107.35 6480.25,4151.1 6595.53,4151.1 6607.25,4139.39 6607.25,4013.7 6563.5,3969.95 D18.1@6563.5,3956.3 6566.2,3959 C18.2@6675,3959 6676,3960 6800,3960 ; D85.1@6436.5,2693.7 6433.8,2691 6311.5,2691 6256.8,2636.3 6156.47,2636.3 6135.86,2656.91 6135.86,2673.09 6115.25,2693.7 D84.1@6061.5,2693.7 6058.8,2691 5936.5,2691 5881.8,2636.3 5730.25,2636.3 5686.5,2680.05 D83.1@5686.5,2693.7 5683.8,2691 5561.5,2691 5506.8,2636.3 5406.47,2636.3 5385.86,2656.91 5385.86,2673.09 5365.25,2693.7 D82.1@5311.5,2693.7 5308.8,2691 5186.5,2691 5131.8,2636.3 5031.47,2636.3 5010.86,2656.91 5010.86,2673.09 4990.25,2693.7 D81.1@4936.5,2693.7 4933.8,2691 4811.5,2691 4756.8,2636.3 4605.25,2636.3 4561.5,2680.05 D80.1@4561.5,2693.7 4558.8,2691 4436.5,2691 4381.8,2636.3 4281.47,2636.3 4260.86,2656.91 4260.86,2673.09 4240.25,2693.7 D79.1@4186.5,2693.7 4183.8,2691 4061.5,2691 4006.8,2636.3 3906.47,2636.3 3885.86,2656.91 3885.86,2673.09 3865.25,2693.7 D78.1@3811.5,2693.7 3808.8,2691 3686.5,2691 3631.8,2636.3 3531.47,2636.3 3506.38,2661.38 3506.38,2668.62 3481.3,2693.7 D77.1@3436.5,2693.7 3433.8,2691 3311.5,2691 3256.8,2636.3 3105.25,2636.3 3061.5,2680.05 D76.1@3061.5,2693.7 3058.8,2691 2936.5,2691 2881.8,2636.3 2781.47,2636.3 2756.38,2661.38 2756.38,2668.62 2731.3,2693.7 D75.1@2686.5,2693.7 2683.8,2691 2509.5,2691 2490.02,2671.52 2490.02,2655.78 2470.53,2636.3 2406.47,2636.3 2381.38,2661.38 2381.38,2668.62 2356.3,2693.7 D74.1@2311.5,2693.7 2308.8,2691 2186.5,2691 2131.8,2636.3 2031.47,2636.3 2010.86,2656.91 2010.86,2673.09 1990.25,2693.7 D73.1@1936.5,2693.7 1933.8,2691 1811.5,2691 1756.8,2636.3 1656.47,2636.3 1635.86,2656.91 1635.86,2673.09 1615.25,2693.7 D72.1@1561.5,2693.7 1558.8,2691 1436.5,2691 1381.8,2636.3 1281.47,2636.3 1260.86,2656.91 1260.86,2673.09 1240.25,2693.7 D71.1@1186.5,2693.7 1183.8,2691 1061.5,2691 1006.8,2636.3 855.25,2636.3 811.5,2680.05 D70.1@811.5,2693.7 808.8,2691 686.5,2691 631.8,2636.3 480.25,2636.3 436.5,2680.05 D69.1@436.5,2693.7 433.8,2691 311.5,2691 269.5,2733 269.5,3028.25 325,3083.75 C35.2@325,3391 ; C97.2@6625,2284 6516.2,2284 D97.1@6513.5,2281.3 ; C52.2@6675,3259 6566.2,3259 D52.1@6563.5,3256.3 6563.5,3269.95 6607.25,3313.7 6607.25,3439.39 6595.53,3451.1 6480.25,3451.1 6436.5,3407.35 D51.1@6436.5,3393.7 6433.8,3391 C51.2@6325,3391 6325,3271 6313,3259 6191.2,3259 D53.1@6188.5,3256.3 6188.5,3269.95 6092.15,3366.3 6075.25,3366.3 6061.5,3380.05 D50.1@6061.5,3393.7 6058.8,3391 C50.2@5950,3391 5950,3271 5938,3259 5816.2,3259 D54.1@5813.5,3256.3 5813.5,3269.95 5717.15,3366.3 5700.25,3366.3 5686.5,3380.05 D49.1@5686.5,3393.7 5683.8,3391 C49.2@5575,3391 5575,3271 5563,3259 5441.2,3259 D55.1@5438.5,3256.3 5438.5,3269.95 5342.15,3366.3 5325.25,3366.3 5311.5,3380.05 D48.1@5311.5,3393.7 5308.8,3391 C48.2@5200,3391 5200,3271 5188,3259 5066.2,3259 D56.1@5063.5,3256.3 5063.5,3269.95 4967.15,3366.3 4950.25,3366.3 4936.5,3380.05 D47.1@4936.5,3393.7 4933.8,3391 C47.2@4825,3391 4825,3271 4813,3259 4691.2,3259 D57.1@4688.5,3256.3 4688.5,3269.95 4592.15,3366.3 4575.25,3366.3 4561.5,3380.05 D46.1@4561.5,3393.7 4558.8,3391 C46.2@4450,3391 4450,3271 4438,3259 4316.2,3259 D58.1@4313.5,3256.3 4313.5,3269.95 4217.15,3366.3 4200.25,3366.3 4186.5,3380.05 D45.1@4186.5,3393.7 4183.8,3391 C45.2@4075,3391 4075,3271 4063,3259 3941.2,3259 D59.1@3938.5,3256.3 3938.5,3269.95 3842.15,3366.3 3825.25,3366.3 3811.5,3380.05 D44.1@3811.5,3393.7 3808.8,3391 C44.2@3700,3391 3700,3296 3688,3284 3609.5,3284 3609.2,3283.7 3577.25,3283.7 D60.1@3563.5,3269.95 ; C35.2@325,3391 433.8,3391 D35.1@436.5,3393.7 436.5,3380.05 450.25,3366.3 467.15,3366.3 563.5,3269.95 D68.1@563.5,3256.3 566.2,3259 688,3259 700,3271 C36.2@700,3391 808.8,3391 D36.1@811.5,3393.7 811.5,3380.05 825.25,3366.3 842.15,3366.3 938.5,3269.95 D67.1@938.5,3256.3 941.2,3259 1063,3259 1075,3271 C37.2@1075,3391 1183.8,3391 D37.1@1186.5,3393.7 1186.5,3380.05 1200.25,3366.3 1217.15,3366.3 1313.5,3269.95 D66.1@1313.5,3256.3 1316.2,3259 1438,3259 1450,3271 C38.2@1450,3391 1558.8,3391 D38.1@1561.5,3393.7 1561.5,3380.05 1575.25,3366.3 1592.15,3366.3 1688.5,3269.95 D65.1@1688.5,3256.3 1691.2,3259 1813,3259 1825,3271 C39.2@1825,3391 1933.8,3391 D39.1@1936.5,3393.7 1936.5,3380.05 1950.25,3366.3 1967.15,3366.3 2063.5,3269.95 D64.1@2063.5,3256.3 2066.2,3259 2188,3259 2200,3271 C40.2@2200,3391 2308.8,3391 D40.1@2311.5,3393.7 2311.5,3380.05 2325.25,3366.3 2342.15,3366.3 2438.5,3269.95 D63.1@2438.5,3256.3 2441.2,3259 2563,3259 2575,3271 C41.2@2575,3391 2683.8,3391 D41.1@2686.5,3393.7 2686.5,3380.05 2700.25,3366.3 2717.15,3366.3 2813.5,3269.95 D62.1@2813.5,3256.3 2816.2,3259 2938,3259 2950,3271 C42.2@2950,3391 3058.8,3391 D42.1@3061.5,3393.7 3061.5,3380.05 3075.25,3366.3 3092.15,3366.3 3188.5,3269.95 D61.1@3188.5,3256.3 3191.2,3259 3313,3259 3325,3271 C43.2@3325,3391 3433.8,3391 D43.1@3436.5,3393.7 3436.5,3380.05 3450.25,3366.3 3467.15,3366.3 D60.1@3563.5,3269.95 ; D92.1@550,4793.7 590.25,4793.7 610.86,4773.09 610.86,4756.91 631.47,4736.3 1175.63,4736.3 1230.33,4791 1933.8,4791 D93.1@1936.5,4793.7 1990.25,4793.7 2010.86,4773.09 2010.86,4756.91 2031.47,4736.3 2563.13,4736.3 2617.83,4791 3308.8,4791 D94.1@3311.5,4793.7 3311.5,4780.05 3355.25,4736.3 4656.8,4736.3 4711.5,4791 4833.8,4791 D95.1@4836.5,4793.7 4890.25,4793.7 4910.86,4773.09 4910.86,4756.91 4931.47,4736.3 5475.63,4736.3 5530.33,4791 6233.8,4791 D96.1@6236.5,4793.7 6236.5,4780.05 6800,4216.55 6800,3960 ; D87.1@4836.5,6293.7 4850.25,6307.45 D87.1@4850.25,6321.1 ; D97.1@6513.5,2281.3 6513.5,2554.26 6800,2840.76 6800,3960